# Altium PCB Brelok_DS(NEW).PcbDoc
Units mm, origin at the board's own origin, x right, y up, seen from the top; angles counter-clockwise.
Board outline 38.98 x 50.15 mm, 2 copper layers (Top Layer, Bottom Layer); 32 components, 26 nets, 109 pads, 36 vias.
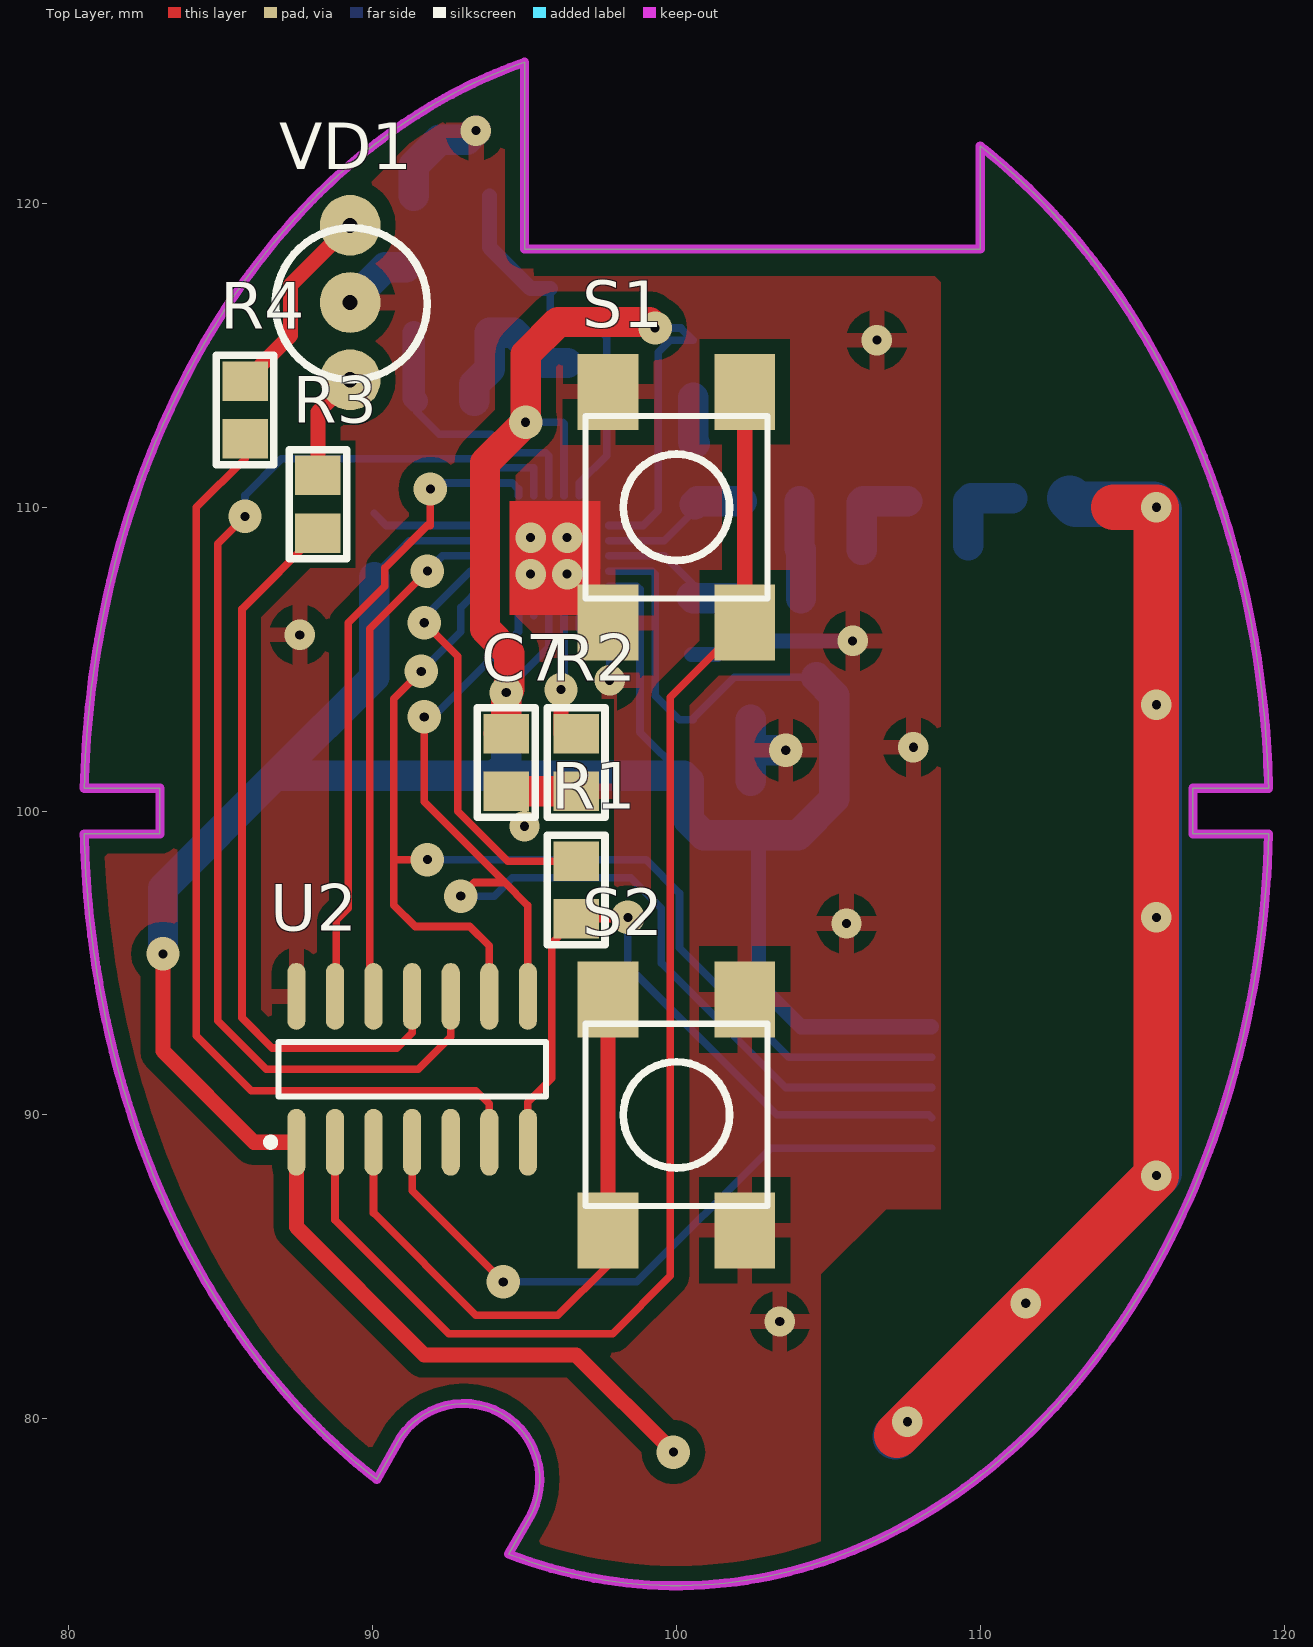
[diagram p0: Top Layer view]
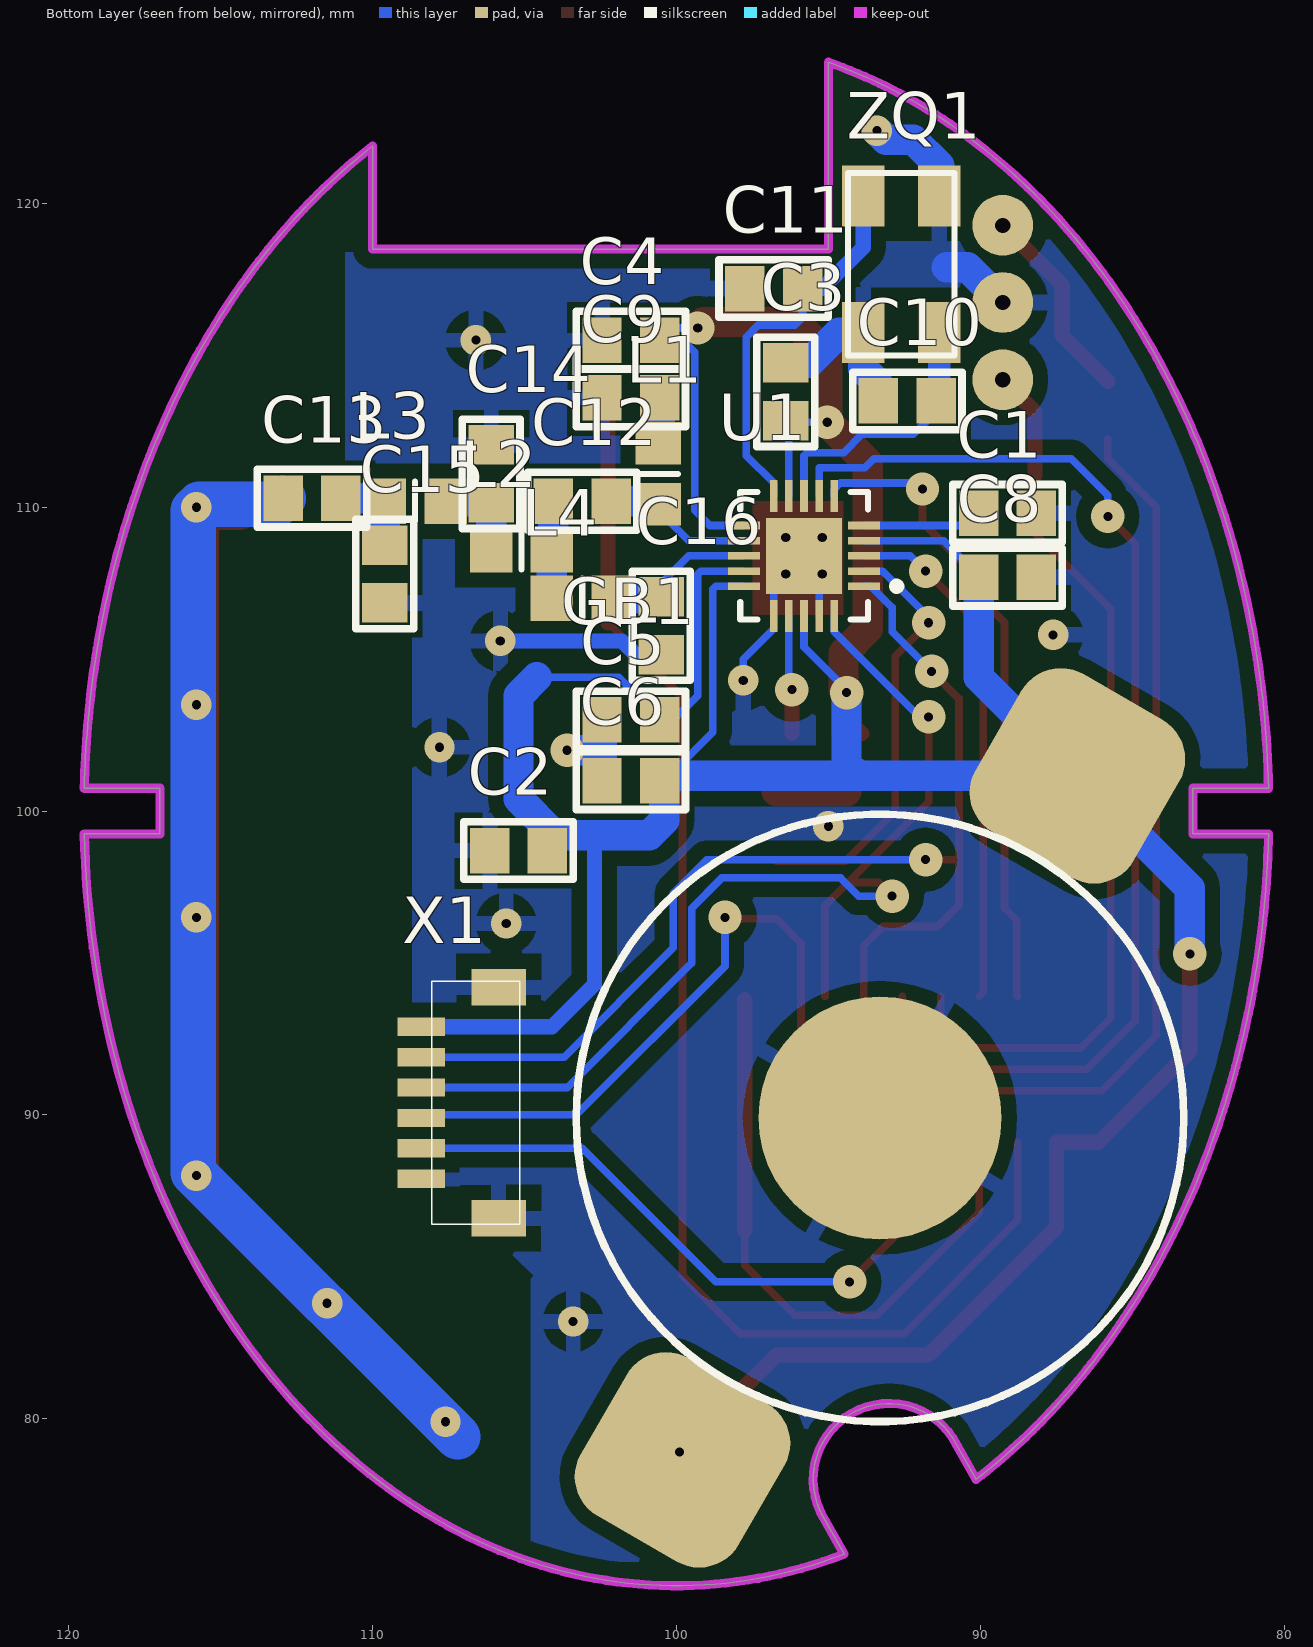
[diagram p1: Bottom Layer view, seen from below]

## Layer stack, top to bottom
Top Layer: signal copper 0.0356
Dielectric: dielectric 0.32, FR-4, Dk 4.8
Bottom Layer: signal copper 0.0356

## Board outline
410 vertices, not listed, extent 80.508,74.501 119.492,124.648

## Design rules (kind name [scope] priority, off if disabled: settings)
Clearance "Clearance_GND_VCC +3.3" [InNet('GND') vs InNet('VCC +3.3')] p1 off: gap=0.2
Clearance Clearance_U3_Trace [(IsTrack  And IsNet)  And InRegion(3815,3770 ,4275 ,4280) vs (IsTrack  And IsNet)  And InRegion(3815,3770 ,4275 ,4280)] p2: gap=0.2
Clearance Clearance_QFP_NET [InNet('VCC','GND','NetC12_1','NetC16_1','NetC10_2','NetC11_2','NetU1_6','NetU1_7','NetC1_2','NetU1_3','NetR1_2','NetU1_1','NetR2_2','NetU1_20')  And InRegion(3503,4043 ,4086 ,4645) vs InNet('VCC','GND','NetC12_1','NetC16_1','NetC10_2','NetC11_2','NetU1_6','NetU1_7','NetC1_2','NetU1_3','NetR1_2','NetU1_1','NetR2_2')  And InRegion(3503,4043 ,4086 ,4645)] p3: gap=0.2
Clearance Clearance_QFP_Pins [InComponent('U1') And IsPad] p4: gap=0.2
Clearance Clearance_GND [InPolygon] p5: gap=0.5
Clearance [All] p6: gap=0.3
ComponentClearance ComponentClearance_R1_C10 [InComponent('C10') vs InComponent('R1')] p1 off: gap=0 collisioncheckmode=3 verticalgap=0 showdistances=FALSE
ComponentClearance [All] p2 off: gap=0.3 collisioncheckmode=3 verticalgap=0.3 showdistances=FALSE
HoleSize [All] p1: absolutevalues=TRUE maxlimit=5 minlimit=0.3 maxpercent=80.000 minpercent=20.000
MinimumSolderMaskSliver [All] p1 off: minsoldermaskwidth=0.254
NetAntennae [All] p1 off: netantennaetolerance=50
PlaneConnect [All] p1: planeconnectstyle=Relief reliefexpansion=0.508 reliefentries=4 reliefconductorwidth=0.3 reliefairgap=0.3
PolygonConnect [All] p1: connectstyle=Relief reliefconductorwidth=0.5 reliefentries=4 polygonreliefangle="90 Angle"
RoutingCorners [All] p1: cornerstyle=45-Degree minsetback=2.54 maxsetback=5
RoutingVias [All] p1: holewidth=0.5 width=1.6 viastyle="Through Hole" minholewidth=0.3 minwidth=1 maxholewidth=1 maxwidth=2
ShortCircuit ShortCircuit_ANT1 [InComponent(C13)] p1: allowed=TRUE
ShortCircuit [All] p2: allowed=FALSE
SilkToSilkClearance [All] p1 off: silktosilkclearance=0.3
SilkscreenOverComponentPads [All] p1 off: minsilkscreentomaskgap=0.254
SolderMaskExpansion [All] p1: expansion=0.102
Width [All] p1: maxlimit=5 minlimit=0.2 preferedwidth=0.3
19 further rules are at their usual default settings.

## Components (designator, comment, footprint, x,y, rotation, side; value= is the part's Value field where it differs from the comment)
C1 "KONDENS_SMD" C0805 89.1,109.8 r0 bottom
C2 "KONDENS_SMD" C0805 105.2,98.7 r0 bottom
C3 "KONDENS_SMD" C0805 96.4,113.8 r270 bottom
C4 "KONDENS_SMD" C0805 101.5,115.5 r180 bottom
C5 "KONDENS_SMD" C0805 101.5,103 r180 bottom
C6 "KONDENS_SMD" C0805 101.5,101 r180 bottom
C7 "KONDENS_SMD" C0805 94.4,101.6 r90 top
C8 "KONDENS_SMD" C0805 89.1,107.7 r0 bottom
C9 "KONDENS_SMD" C0805 101.5,113.6 r180 bottom
C10 "KONDENS_SMD" C0805 92.4,113.5 r180 bottom
C11 "KONDENS_SMD" C0805 96.8,117.2 r180 bottom
C12 "KONDENS_SMD" C0805 103.1,110.2 r0 bottom
C13 "KONDENS_SMD" C0805 112,110.3 r0 bottom
C14 "KONDENS_SMD" C0805 106.1,111.1 r90 bottom
C15 "KONDENS_SMD" C0805 109.6,107.8 r270 bottom
C16 "KONDENS_SMD" C0805 100.5,106.1 r270 bottom
GB1 "CR2032" BAT_Holder_CR2032 93.3,89.9 r210 bottom
L1 "SMD_0805" 6-0805_M 100.6,111.1 r90 bottom
L2 "SMD_0805" 6-0805_M 105.1,108.6 r0 bottom
L3 "SMD_0805" 6-0805_M 108.6,110.2 r0 bottom
L4 "SMD_0805" 6-0805_M 103.1,107 r0 bottom
R1 "RES" C0805 96.7,97.4 r90 top
R2 "RES" C0805 96.7,101.6 r90 top
R3 "RES" C0805 88.2,110.1 r270 top
R4 "RES" C0805 85.8,113.2 r270 top
S1 "KAN0642-0501B" KAN0642-0501B 100,110 r270 top
S2 "KAN0642-0501B" KAN0642-0501B 100,90 r90 top
U1 "CC1101" VQFN20 95.8,108.4 r0 bottom
U2 "ATtiny44A-SSU" 14S1_N 91.3,91.5 r90 top
VD1 "LIGHTDIODE2" LIGHTDIODE2 89.3,116.7 r270 top
X1 "SH06V" SH06V 108.4,92.9 r90 bottom
ZQ1 "SMD0603" Quartz_SMD0603 92.6,118 r270 bottom

## Footprints (in the part's own frame and the unit in brackets; to place one, negate y for a bottom-side part, rotate by r counter-clockwise, add the part's x,y. Pads: shape width x height; smd on the part's side, far side on the other; paste and mask are expansions set on the pad)
6-0805_M [mm] "Chip Resistor, Body 2.0x1.2mm, IPC Low Density"
  rect 1.4x1.5 smd: 1(-1,0) 2(1,0)
  silkscreen extent 0,-0.65 0,0.65, body extent -1.07,-0.7 1.07,0.7, height 0.7
14S1_N [mm] "SOIC, 14-Leads, Body 8.7x3.9mm, Pitch 1.27mm, IPC Medium Density"
  oval 2.2x0.6 smd: 1(-2.4,3.81) 2(-2.4,2.54) 3(-2.4,1.27) 4(-2.4,0) 5(-2.4,-1.27) 6(-2.4,-2.54) 7(-2.4,-3.81) 8(2.4,-3.81) 9(2.4,-2.54) 10(2.4,-1.27) 11(2.4,0) 12(2.4,1.27) 13(2.4,2.54) 14(2.4,3.81)
  silkscreen extent -2.52,-4.4 0.9,4.78, body extent -2,-4.38 2,4.38, height 1.75
BAT_Holder_CR2032 [mm] "BTH-W39-20"
  rrect50% 6x6 smd: +(0,-13) +(0,13)
  round 8 smd: -(0,0)
  silkscreen extent -10,-10 10,10
C0805 [mm]
  rect 1.3x1.5 smd: 1(-0.95,0) 2(0.95,0)
  silkscreen extent -1.8,-0.95 1.8,0.95
KAN0642-0501B [mm]
  rect 2.5x2 smd: 1(-3.8,2.25) 1(3.8,2.25) 2(-3.8,-2.25) 2(3.8,-2.25)
  silkscreen extent -3,-3 3,3
LIGHTDIODE2 [mm]
  round 2 hole 0.5: 1(-0.04,-0.04) 2(-2.58,-0.04) 3(2.5,-0.04)
  silkscreen extent -2.5,-2.5 2.5,2.5
Quartz_SMD0603 [mm]
  rect 2x1.4 smd: 1(-2.25,-1.25) 2(2.25,-1.25) 3(2.25,1.25) 4(-2.25,1.25)
  silkscreen extent -3,-1.75 3,1.75
SH06V [mm]
  rect 0.6x1.55 smd: 1(0,0) 2(-1,0) 3(-2,0) 4(-3,0) 5(-4,0) 6(-5,0)
  rect 1.2x1.8 smd: 7(-6.3,-2.55) 8(1.3,-2.55)
  silkscreen extent -6.5,-3.25 1.5,-0.35
VQFN20 [mm] "QFN, 20-Leads, Body 4,2x4,2mm (max), Pitch 0,50mm, IPC Low Density"
  rect 1.05x0.25 smd: 1(-1.975,1) 2(-1.975,0.5) 3(-1.975,0) 4(-1.975,-0.5) 5(-1.975,-1) 11(1.975,-1) 12(1.975,-0.5) 13(1.975,0) 14(1.975,0.5) 15(1.975,1)
  rect 0.25x1.05 smd: 6(-1,-1.975) 7(-0.5,-1.975) 8(0,-1.975) 9(0.5,-1.975) 10(1,-1.975) 16(1,1.975) 17(0.5,1.975) 18(0,1.975) 19(-0.5,1.975) 20(-1,1.975)
  rect 2.5x2.5 smd: 21(0,0)
  silkscreen extent -3.17,-2.1 2.1,2.1, body extent -2.07,-2.07 2.07,2.07, height 0.8

## Part data
GB1: library part BAT_Holder_CR2032, "BTH-W39-20"
L1 L2 L3 L4: library part Induktor_0805
R1 R2 R3 R4: "Resistor"
U2: "8-bit AVR Microcontroller, 1.8-5.5V, 4KB Flash, 256 Bytes EEPROM, 256 Bytes SRAM, 14-pin SOIC, Industrial Grade (-40°C to 85°C), Pb-Free"
ZQ1: library part Quartz_SMD0603

## Via types
v1: diameter 1.1, hole 0.3, Top Layer to Bottom Layer, 17 vias
v2: diameter 1, hole 0.3, Top Layer to Bottom Layer, 15 vias
v3: diameter 1, hole 0.3, Top Layer to Bottom Layer, tented top, 4 vias

## Nets (pads, with @x,y where several pads share a name; then routed paths per layer and width w, separated by ;. In a path a pad name is that pad's centre, name@x,y a point inside that pad or via, vN(x,y) a via of type N, cw(c..) or ccw(c..) an arc to the next point about the centre after c; other vN are vias at no path point)
GND: C1.1 C2.2 C3.1 C4.1 C5.1 C6.1 C7.1 C8.1 C9.1 C10.1 C11.1 C14.2 C15.2 C16.2 GB1.- R2.1 S1.2 S2.2 U1.16 U1.19 U1.21 U2.14 VD1.1 X1.6 X1.7 X1.8 ZQ1.2 ZQ1.4 | length 27.7
  Top Layer w1: C7.1 R2.1
  Bottom Layer w0.25: v3(95.2,107.8) 95.3,107.7 U1.19 ; v3(96.4,107.8) 96.8,107.4 U1.16 96.8,106 97.8,105 v2(97.8,104.3)
  Bottom Layer w0.5: C16.2 101.35,105.15 101.8,105.6 v2(105.8,105.6)
  Bottom Layer w1: VD1.1 90.42,117.9 91.1,117.9 ; ZQ1.4 91.35,121.25 92.2,122.1 93.1,122.1 v2(93.4,122.4) ; C10.1 93.35,114.05 93.85,114.55 ZQ1.2 94.65,115.75 95.65,114.75 C3.1 ; C6.1 102.45,102 ; C5.1 102.45,102 ; v1(103.6,102) 102.45,102
  other v2: 103.4,83.2 105.6,96.3 95,99.5 107.8,102.1 87.6,105.8 106.6,115.5
  other v3: 95.2,109 96.4,109
NetC1_2: C1.2 U1.5 | length 3.9
  Bottom Layer w0.25: C1.2 90.45,109.4 U1.5
NetC9_2: C9.2 L1.2 | length 1.5
  Bottom Layer w1: C9.2 100.55,112.15 L1.2
NetC10_2: C10.2 U1.8 ZQ1.3 | length 8.9
  Bottom Layer w0.25: C10.2 91.45,113.15 92.2,112.4 93.9,112.4 94.5,111.8 95.7,111.8 95.8,111.7 U1.8
  Bottom Layer w0.75: ZQ1.3 91.35,113.6 C10.2
NetC11_2: C11.2 U1.10 ZQ1.1 | length 12.9
  Bottom Layer w0.25: C11.2 95.85,116.25 96.1,116 97.3,116 97.7,115.6 97.7,111.7 96.8,110.8 U1.10
  Bottom Layer w0.5: ZQ1.1 93.85,118.55 95.2,117.2 C11.2
NetC12_1: C12.1 L1.1 U1.12 | length 5
  Bottom Layer w0.25: U1.12 99.6,108.9 100.6,109.9 L1.1
  Bottom Layer w1: L1.1 100.7,110.2 C12.1
NetC12_2: C12.2 L2.1 L4.2 | length 3.2
  Bottom Layer w1: C12.2 104.05,108.65 L2.1 L4.2
NetC13_1: C13.1 C15.1 L3.2 | length 2.9
  Bottom Layer w1: C15.1 L3.2 109.7,110.3 C13.1
NetC14_1: C14.1 L2.2 L3.1 | length 3.1
  Bottom Layer w1: L2.2 C14.1 106.15,110.2 L3.1
NetC16_1: C16.1 L4.1 U1.13 | length 5.2
  Bottom Layer w0.25: U1.13 99.6,108.4 100.5,107.5 C16.1
  Bottom Layer w1: C16.1 100.55,107 L4.1
NetR1_1: R1.1 U2.7 X1.4 | length 23.4
  Top Layer w0.25: U2.7 95.11,90.41 95.9,91.2 95.9,95.65 R1.1 98.35,96.45 v1(98.4,96.5)
  Bottom Layer w0.25: v1(98.4,96.5) 98.4,94.9 103.3,90 108.3,90 X1.4
NetR1_2: R1.2 U1.2 | length 14.2
  Top Layer w0.25: v1(91.7,106.2) 92.8,105.1 92.8,100 94.45,98.35 R1.2
  Bottom Layer w0.25: v1(91.7,106.2) 91.7,106.385 93.215,107.9 U1.2
NetR2_2: R2.2 U1.17 | length 4
  Top Layer w0.5: R2.2@96.2,102.55 v1(96.2,104)
  Bottom Layer w0.25: v1(96.2,104) 96.3,104 U1.17
NetR3_1: R3.1 VD1.3 | length 3.6
  Top Layer w0.5: R3.1 88.2,113.14 VD1.3
NetR3_2: R3.2 U2.11 | length 24.4
  Top Layer w0.25: R3.2 85.7,106.65 85.7,93.2 86.7,92.2 90.8,92.2 91.3,92.7 U2.11
NetR4_1: R4.1 VD1.2 | length 6.6
  Top Layer w0.5: R4.1 87.3,115.65 87.3,117.32 VD1.2
NetR4_2: R4.2 U2.6 | length 32.1
  Top Layer w0.25: R4.2 85.8,111.6 84.2,110 84.2,92.6 86,90.8 93.4,90.8 93.84,90.36 U2.6
NetS1_1: S1.1 U2.2 | length 46.1
  Top Layer w0.25: U2.2 88.76,86.54 92.5,82.8 97.9,82.8 99.8,84.7 99.8,103.75 S1.1@102.25,106.2
  Top Layer w0.5: S1.1@102.25,106.2 S1.1@102.25,113.8
NetS2_1: S2.1 U2.3 | length 20.9
  Top Layer w0.25: U2.3 90.03,86.77 93.4,83.4 96.1,83.4 97.75,85.05 S2.1@97.75,86.2
  Top Layer w0.5: S2.1@97.75,86.2 S2.1@97.75,93.8
NetU1_1: U1.1 U2.9 X1.2 | length 38.7
  Top Layer w0.25: v1(91.6,104.6) 90.7,103.7 90.7,98.4 ; v1(91.8,98.4) 90.7,98.4 ; U2.9 93.84,95.56 93.2,96.2 91.4,96.2 90.7,96.9 90.7,98.4
  Bottom Layer w0.25: v1(91.6,104.6) 92.9,105.9 92.9,106.7 93.6,107.4 U1.1 ; v1(91.8,98.4) 99,98.4 100.1,97.3 100.1,95.5 103.7,91.9 X1.2
NetU1_3: U1.3 U2.12 | length 17.1
  Top Layer w0.25: U2.12 89.9,94.03 89.9,106 v1(91.8,107.9)
  Bottom Layer w0.25: v1(91.8,107.9) 92.3,108.4 U1.3
NetU1_6: U1.6 U2.13 | length 21.3
  Top Layer w0.25: U2.13 88.8,93.94 88.8,96.4 89.2,96.8 89.2,106.2 90.4,107.4 90.4,108 91.8,109.4 91.9,109.4 v1(91.9,110.6)
  Bottom Layer w0.25: v1(91.9,110.6) 92.1,110.8 94.6,110.8 94.8,110.6 U1.6
NetU1_7: U1.7 U2.10 | length 38.8
  Top Layer w0.25: v1(85.8,109.7) 84.9,108.8 84.9,93.1 86.5,91.5 91.5,91.5 92.57,92.57 U2.10
  Bottom Layer w0.25: v1(85.8,109.7) 85.8,110.4 87,111.6 93.5,111.6 93.8,111.3 95.3,111.3 U1.7
NetU1_20: U1.20 U2.8 X1.3 | length 36.7
  Top Layer w0.25: v1(91.7,103.1) 91.7,100.3 94.35,97.65 ; v1(92.9,97.2) 93.35,97.65 94.35,97.65 ; U2.8 95.11,96.89 94.35,97.65
  Bottom Layer w0.25: v1(91.7,103.1) 92,103.1 94.8,105.9 U1.20 ; v1(92.9,97.2) 94,97.2 94.6,97.8 98.5,97.8 99.5,96.8 99.5,95 103.6,90.9 X1.3
NetU2_4: U2.4 X1.5 | length 21.8
  Top Layer w0.25: U2.4 91.3,87.5 v1(94.3,84.5)
  Bottom Layer w0.25: v1(94.3,84.5) 98.7,84.5 103.1,88.9 X1.5
VCC: C2.1 C3.2 C4.2 C5.2 C6.2 C7.2 C8.2 GB1.+ U1.4 U1.9 U1.11 U1.14 U1.15 U1.18 U2.1 X1.1 | length 140.9
  Top Layer w0.25: v1@99.2,116 v1(99.3,115.9)
  Top Layer w0.5: v1(83.1,95.3) 83.1,92.1 86.1,89.1 U2.1 87.49,86.31 91.7,82.1 96.7,82.1 v1(99.9,78.9) ; C7.2@93.9,102.55 C7.2@94,102.65
  Top Layer w1: C7.2 v1(94.4,103.9) 94.5,104 94.5,105.2 93.7,106 93.7,111.464 v1(95.036,112.8) 95.036,115.036 96.1,116.1 99.1,116.1 v1@99.2,116
  Bottom Layer w0.25: C8.2 90.05,107.75 91.2,108.9 U1.4 ; v1@94.3,103.7 v1@94.3,104.3 ; v1(94.4,103.9) 94.4,104 95.8,105.4 U1.18 ; v1(95.036,112.8) 96.25,112.8 96.3,112.75 U1.9 ; U1.15 98.7,107.4 98.8,107.3 98.8,102.6 C6.2@100.242,101.158 ; U1.14 99.2,107.9 99.3,107.8 99.3,103.8 100.1,103 C5.2 100.55,103.05 101.9,104.4 104.6,104.4 ; U1.11 98.9,109.4 99.4,109.9 99.4,115.1 99.8,115.5 C4.2 100.15,115.9 v1(99.3,115.9) ; C6.2@100.4,101 C6.2
  Bottom Layer w0.5: 102.7,99.2 102.7,94.3 104.1,92.9 X1.1
  Bottom Layer w1: v1(83.1,95.3) 83.1,97.458 GB1.+@86.8,101.158 ; C8.2 90.05,104.408 GB1.+@86.8,101.158 ; v1(94.4,103.9) 94.4,101.258 94.1,101.258 94,101.158 ; 104.6,104.4 105.2,103.8 105.2,100.4 104,99.2 102.7,99.2 100.9,99.2 100.4,99.7 100.4,101 100.242,101.158 94,101.158 ; GB1.+@86.8,101.158 94,101.158
pads on no net: C13.2 U2.5
copper on no net: | length 72.7
  Top Layer w1.5: 107.25,79.45 v2(115.8,88) v2(115.8,110) 114.4,110
  Bottom Layer w1.5: 107.2,79.4 115.9,88.1 115.9,88.5 115.9,107.35 115.9,108.4 115.9,109.9 115.7,110.1 115.163,110.1 113.15,110.1 112.95,110.3
  other v2: 107.6,79.9 111.5,83.8 115.8,96.5 115.8,103.5

## Polygon pours and split planes (outlines as drawn)
GND on Top Layer "TOP" (solid, remove dead copper, pour order 2): 95.056,123.661 94.216,122.82 92.065,122.82 86.623,117.378 86.623,117.276 86.476,117.276 80.7,111.5 80.7,86.7 93.3,74.1 93.472,74.272 104.747,74.272 104.747,84.747 106.9,86.9 108.7,86.9 108.7,117.4 108.5,117.6 95.3,117.6
GND on Bottom Layer "BOT" (solid, remove dead copper, pour order 4): 94.9,124.612 91.512,124.612 85.8,118.9 79.6,112.7 79.6,108.8 79.6,88.1 92,75.7 92.416,75.284 104.797,75.284 104.797,84.603 104.7,84.7 106.8,86.8 106.8,86.9 108.6,86.9 108.7,87 108.7,105.6 110.3,105.6 110.8,106.1 110.9,106.2 110.9,118.4 110.1,118.4 110,118.5 95,118.5

## Keep-outs
Keep-Out Layer:
  lines w0.3: 95.238,76.886 94.479,75.543 94.826,75.414 95.174,75.293 95.523,75.181 95.875,75.077 96.227,74.982 96.581,74.895 96.936,74.817 97.293,74.747 97.65,74.686 98.008,74.633 98.366,74.59 98.725,74.555 99.085,74.528 99.445,74.51 99.805,74.501 100.165,74.501 100.525,74.509 100.885,74.526 101.245,74.552 101.604,74.586 101.962,74.629 102.32,74.681 102.677,74.742 103.034,74.81 103.389,74.888 103.743,74.974 104.096,75.069 104.447,75.172 104.797,75.284 105.145,75.404 105.492,75.532 105.836,75.669 106.179,75.814 106.52,75.967 106.858,76.129 107.194,76.299 107.527,76.476 107.858,76.662 108.186,76.856 108.512,77.058 108.834,77.267 109.154,77.484 109.47,77.709 109.784,77.942 110.093,78.182 110.4,78.429 110.703,78.684 111.002,78.946 111.297,79.216 111.589,79.492 111.877,79.775 112.16,80.066 112.44,80.363 112.715,80.666 112.986,80.977 113.252,81.294 113.514,81.617 113.771,81.946 114.024,82.282 114.272,82.624 114.515,82.971 114.753,83.325 114.986,83.684 115.214,84.049 115.436,84.419 115.654,84.794 115.866,85.175 116.073,85.561 116.274,85.951 116.469,86.347 116.659,86.747 116.844,87.151 117.022,87.56 117.195,87.973 117.362,88.391 117.523,88.812 117.678,89.237 117.827,89.666 117.97,90.098 118.107,90.534 118.237,90.973 118.362,91.415 118.48,91.86 118.592,92.307 118.697,92.758 118.796,93.21 118.889,93.665 118.975,94.123 119.055,94.582 119.128,95.043 119.195,95.506 119.255,95.97 119.309,96.436 119.356,96.903 119.396,97.371 119.43,97.84 119.457,98.309 119.478,98.779 119.492,99.25 117,99.25 117,100.75 119.492,100.75 119.485,101.008 119.476,101.266 119.465,101.524 119.452,101.782 119.438,102.04 119.421,102.297 119.402,102.554 119.381,102.811 119.358,103.068 119.334,103.324 119.307,103.58 119.278,103.835 119.247,104.091 119.215,104.345 119.18,104.6 119.144,104.854 119.105,105.107 119.064,105.36 119.022,105.612 118.977,105.864 118.931,106.115 118.883,106.365 118.832,106.615 118.78,106.864 118.726,107.113 118.67,107.36 118.612,107.607 118.552,107.853 118.49,108.099 118.427,108.343 118.361,108.587 118.294,108.83 118.224,109.072 118.153,109.313 118.08,109.553 118.005,109.792 117.928,110.03 117.85,110.267 117.769,110.503 117.687,110.737 117.603,110.971 117.517,111.204 117.429,111.435 117.34,111.666 117.249,111.895 117.156,112.123 117.061,112.349 116.964,112.575 116.866,112.799 116.766,113.022 116.664,113.243 116.561,113.463 116.456,113.682 116.349,113.899 116.24,114.115 116.13,114.329 116.018,114.542 115.905,114.754 115.79,114.964 115.673,115.172 115.555,115.379 115.435,115.584 115.313,115.788 115.19,115.99 115.065,116.19 114.939,116.389 114.811,116.586 114.682,116.781 114.551,116.975 114.419,117.167 114.286,117.357 114.15,117.545 114.014,117.732 113.876,117.917 113.736,118.1 113.595,118.281 113.453,118.46 113.309,118.637 113.164,118.812 113.018,118.986 112.87,119.157 112.721,119.327 112.571,119.494 112.419,119.66 112.266,119.823 112.112,119.985 111.956,120.144 111.8,120.302 111.642,120.457 111.483,120.61 111.322,120.761 111.161,120.91 110.998,121.057 110.835,121.201 110.67,121.344 110.504,121.484 110.337,121.622 110.169,121.758 110,121.892 110,118.5 95,118.5 95,124.648 94.756,124.561 94.514,124.47 94.272,124.375 94.031,124.276 93.791,124.173 93.552,124.066 93.314,123.954 93.078,123.839 92.842,123.72 92.608,123.597 92.375,123.47 92.143,123.338 91.913,123.203 91.683,123.065 91.456,122.922 91.229,122.775 91.005,122.625 90.781,122.471 90.56,122.313 90.339,122.151 90.121,121.985 89.904,121.816 89.689,121.643 89.475,121.467 89.264,121.287 89.054,121.103 88.846,120.916 88.639,120.726 88.435,120.531 88.233,120.334 88.032,120.133 87.834,119.929 87.638,119.721 87.444,119.51 87.251,119.296 87.061,119.078 86.873,118.857 86.688,118.633 86.504,118.406 86.323,118.176 86.144,117.943 85.968,117.707 85.794,117.468 85.622,117.226 85.453,116.981 85.286,116.733 85.121,116.483 84.959,116.229 84.8,115.973 84.643,115.715 84.488,115.453 84.337,115.189 84.188,114.923 84.041,114.654 83.897,114.382 83.756,114.108 83.618,113.832 83.482,113.553 83.35,113.273 83.22,112.989 83.092,112.704 82.968,112.417 82.846,112.127 82.728,111.836 82.612,111.542 82.499,111.247 82.389,110.95 82.282,110.65 82.178,110.35 82.077,110.047 81.979,109.743 81.884,109.437 81.792,109.129 81.704,108.82 81.618,108.509 81.535,108.197 81.455,107.884 81.379,107.569 81.305,107.253 81.235,106.936 81.168,106.618 81.104,106.298 81.043,105.978 80.986,105.656 80.931,105.334 80.88,105.01 80.832,104.686 80.787,104.361 80.746,104.035 80.707,103.709 80.672,103.382 80.64,103.054 80.612,102.726 80.586,102.398 80.564,102.069 80.545,101.739 80.53,101.41 80.517,101.08 80.508,100.75 83,100.75 83,99.25 80.508,99.25 80.515,98.99 80.524,98.73 80.535,98.47 80.548,98.21 80.563,97.95 80.58,97.691 80.599,97.431 80.62,97.172 80.643,96.914 80.668,96.655 80.696,96.397 80.725,96.14 80.756,95.882 80.789,95.626 80.824,95.369 80.861,95.114 80.901,94.858 80.942,94.603 80.985,94.349 81.03,94.096 81.077,93.842 81.126,93.59 81.177,93.338 81.23,93.087 81.285,92.837 81.342,92.587 81.401,92.339 81.462,92.091 81.524,91.844 81.589,91.597 81.656,91.352 81.724,91.107 81.795,90.864 81.867,90.621 81.941,90.379 82.017,90.139 82.095,89.899 82.175,89.66 82.257,89.423 82.34,89.186 82.425,88.951 82.513,88.717 82.602,88.484 82.693,88.252 82.785,88.022 82.88,87.793 82.976,87.565 83.074,87.338 83.174,87.112 83.275,86.888 83.378,86.666 83.483,86.444 83.59,86.225 83.699,86.006 83.809,85.789 83.921,85.574 84.034,85.36 84.149,85.147 84.266,84.936 84.385,84.727 84.505,84.519 84.626,84.313 84.75,84.109 84.875,83.906 85.001,83.705 85.129,83.505 85.259,83.307 85.39,83.111 85.522,82.917 85.657,82.725 85.792,82.534 85.929,82.345 86.068,82.158 86.208,81.973 86.35,81.79 86.492,81.609 86.637,81.429 86.783,81.252 86.93,81.076 87.078,80.903 87.228,80.731 87.379,80.561 87.532,80.394 87.685,80.228 87.84,80.065 87.997,79.904 88.154,79.744 88.313,79.587 88.473,79.432 88.634,79.279 88.797,79.129 88.96,78.98 89.125,78.834 89.291,78.69 89.458,78.548 89.626,78.408 89.795,78.271 89.965,78.135 90.137,78.003 90.913,79.377 cw(c93,78) 95.25,76.911

## Other copper
Top Layer:
  rectangle net GND: 94.5,106.45 97.5,110.2

## Silkscreen, mask and mechanical layers (free items; w line width, h text height)
Mechanical 1:
  drawing of 408 lines, arcs and shapes, not listed